# EAGLE board V1.1_CNY70 (EAGLE 5.09)
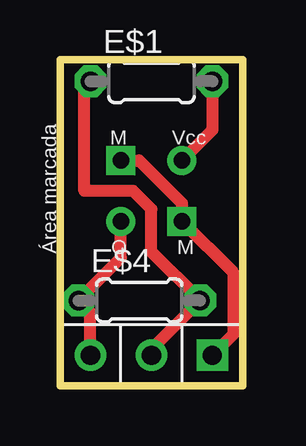
[diagram p0: board, top side]
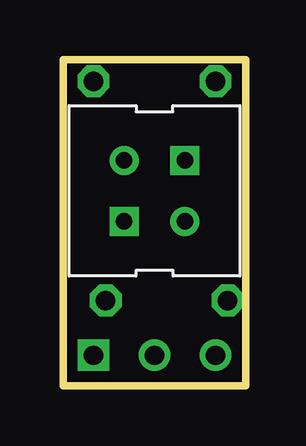
[diagram p1: board, bottom side, seen from below]

Size 7.62 x 13.59 mm. Coordinates in mm from the lower left corner, seen from the top.
Outline: 0,0 7.62,0 7.62,13.59 0,13.59 0,0
Copper layers (1*16): Top 0.035mm / dielectric 1.5mm / Bottom 0.035mm
Design rules "default": minimum track width 10mil, minimum drill 24mil, track to track 8mil, track to pad 8mil, pad to pad 8mil, via to via 8mil, smd to smd 8mil, copper to edge 40mil, drill to drill 8mil, minimum pad ring 10mil, minimum via ring 8mil, stop-mask expansion 4mil, vias tented up to drill 0mil, thermal gap 10mil

## Footprints (pad centres in the part's own frame; a part is rotated, then mirrored left to right if it is on the bottom)
0204/5 = drill 0.813 octagon: 1 -2.54,0; 2 2.54,0
TIRADE3PINES = drill 0.8 square: P$1 1.27,1.27 | drill 0.8 round: P$2 3.81,1.27; P$3 6.35,1.27
CNY70 = drill 0.7 square: P$1 2.54,0; P$2 0,2.54 | drill 0.7 round: P$3 0,0; P$5 2.54,2.54

## Placement (x,y rotation side)
E$1  [0204/5]  3.81,12.7 0 top
E$2  [TIRADE3PINES]  7.62,2.54 180 top
E$3  [CNY70]  5.08,9.4 180 top
E$4  [0204/5]  3.3,3.56 0 top

## Library data of the parts
E$1 E$4 = resistor
E$2 E$3 = Robot

## Nets
S$1: E$2.P$1 E$3.P$1 E$3.P$2
S$2: E$2.P$3 E$3.P$5 E$4.1
S$3: E$1.1 E$2.P$2 E$4.2
S$4: E$1.2 E$3.P$3

## Tracks (layer width: path | path; a pad name or v marks a point on that pad's centre or on a via)
S$1
  Top 0.508: E$3.P$1 3.3,9.4 5.08,7.62 E$3.P$2 7.24,4.7 7.24,2.16 E$2.P$1
S$2
  Top 0.508: E$2.P$3 1.27,3.05 E$4.1 2.54,5.33 E$3.P$5
S$3
  Top 0.508: E$2.P$2 3.81,1.52 E$4.2 3.81,5.59 3.81,7.37 3.05,8.13 1.02,8.13 1.02,12.45 E$1.1
S$4
  Top 0.508: E$1.2 6.35,10.67 E$3.P$3